# Altium PCB vertical.PcbDoc
Units mm, origin at the board's own origin, x right, y up, seen from the top; angles counter-clockwise.
Board outline 10.16 x 14.35 mm, 2 copper layers (Top Layer, Bottom Layer), stack 1.571 mm thick; 19 components, 20 nets, 81 pads, 15 vias.
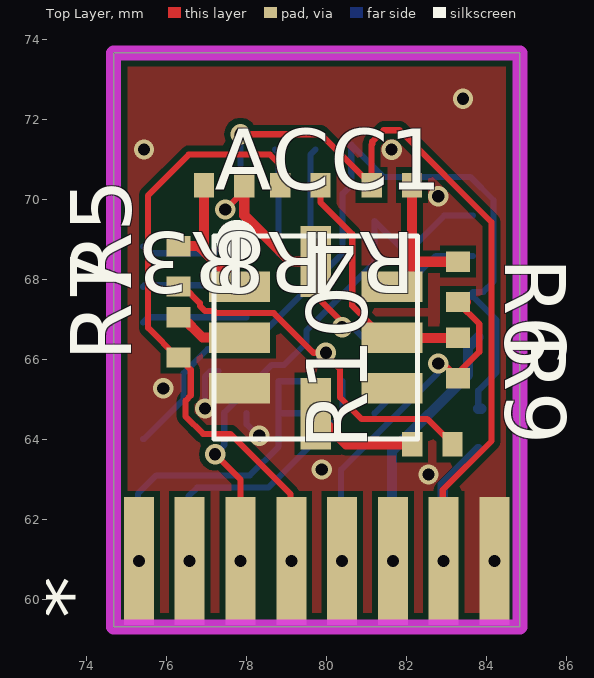
[diagram p0: Top Layer view]
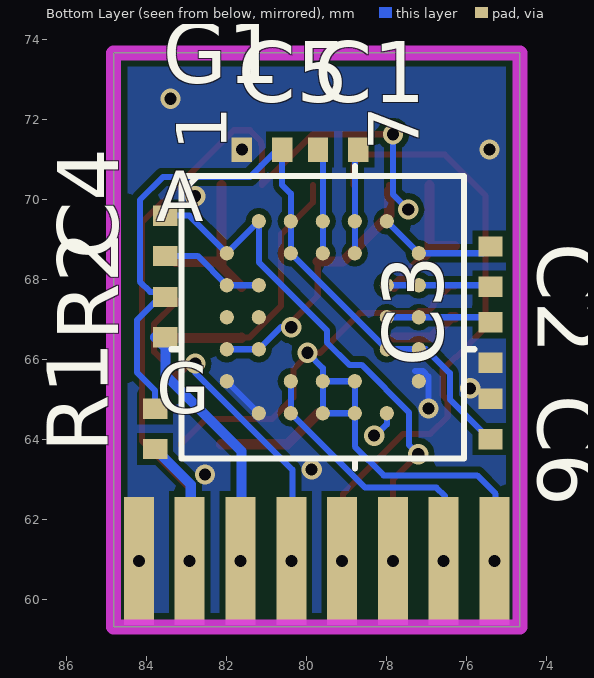
[diagram p1: Bottom Layer view, seen from below]

## Layer stack, top to bottom
Top Solder: solder mask 0.0102, Solder Resist, Dk 3.5
Top Layer: signal copper 0.0356
Dielectric 1: dielectric 1.5, FR-4, Dk 4.8
Bottom Layer: signal copper 0.0356
Bottom Solder: solder mask 0.0102, Solder Resist, Dk 3.5

## Board outline
74.676,59.309 74.676,73.66 84.836,73.66 84.836,59.309

## Design rules (kind name [scope] priority, off if disabled: settings)
Clearance [All] p1: gap=0.152
MinimumSolderMaskSliver [All] p1 off: minsoldermaskwidth=0.254
PolygonConnect [All] p1: connectstyle=Direct reliefconductorwidth=0.254 reliefentries=4 polygonreliefangle="90 Angle" airgapwidth=0.254
RoomDefinition IMU_VERTICAL [InComponentClass('IMU_VERTICAL')] p1 off: confinementstyle=ConfineIn formatcopy=TRUE lockcomponents=FALSE outline 178.943,26.797 202.692,26.797 202.692,38.735 178.943,38.735
RoutingVias [All] p1: holewidth=0.711 width=1.27 viastyle="Through Hole" minholewidth=0.305 minwidth=0.508 maxholewidth=0.711 maxwidth=1.27
SilkToBoardRegionClearance [All] p1 off:
SilkToSilkClearance [All] p1 off: silktosilkclearance=0.254
SilkToSolderMaskClearance [IsPad] p1 off: minsilkscreentomaskgap=0.254 clearancetoexposedcopper=TRUE
SolderMaskExpansion [All] p1: expansion=0.102
UnpouredPolygon [All] p1: allowunpoured=FALSE
Width [All] p1: maxlimit=0.254 minlimit=0.152 preferedwidth=0.254
25 further rules are at their usual default settings.

## Components (designator, comment, footprint, x,y, rotation, side; value= is the part's Value field where it differs from the comment)
* "socket/plug" plug 84.201,60.96 r180 top
ACC1 "ACC-8" ADXL203 79.731,66.544 r0 top
C1 "Cap" 0402 79.223,71.243 r180 bottom
C2 "Cap" 0402 75.413,68.322 r270 bottom
C3 "Cap" 0402 75.413,66.417 r90 bottom
C4 "Cap" 0402 83.541,69.084 r90 bottom
C5 "Cap" 0402 81.128,71.243 r180 bottom
C6 "Cap" 0402 75.413,64.512 r270 bottom
G1 "ADXRS620BBGZ" BG_32_3 79.604,67.052 r180 bottom
R1 "" 0402 83.795,64.258 r90 bottom
R2 "" 0402 83.541,67.052 r90 bottom
R3 "" 0402 77.445,70.354 r180 top
R4 "" 0402 81.636,70.354 r180 top
R5 "" 0402 76.302,68.322 r90 top
R6 "" 0402 83.287,67.941 r270 top
R7 "" 0402 76.302,66.544 r90 top
R8 "" 0402 79.35,70.354 r180 top
R9 "" 0402 83.287,66.036 r270 top
R10 "" 0402 82.652,63.877 r180 top

## Footprints (in the part's own frame and the unit in brackets; to place one, negate y for a bottom-side part, rotate by r counter-clockwise, add the part's x,y. Pads: shape width x height; smd on the part's side, far side on the other; paste and mask are expansions set on the pad)
0402 [mil] "0402-RES"
  rect 20x24 smd: 1(-19.68,0) 2(20,0)
ADXL203 [mil]
  rect 60x30 smd: 1(-75,50) 2(-75,0) 3(-75,-50) 5(75,-50) 6(75,0) 7(75,50)
  rect 30x70 smd: 4(0,-75) 8(0,75)
  silkscreen extent -100,-100 100,100, body extent -100,-100 100,100, height 80
BG_32_3 [mil]
  round 14 smd: A2(-62.99,94.49) A3(-31.5,94.49) A4(0,94.49) A5(31.5,94.49) A6(62.99,94.49) B1(-94.49,62.99) B3(-31.5,62.99) B4(0,62.99) B5(31.5,62.99) B7(94.49,62.99) C1(-94.49,31.5) C2(-62.99,31.5) C6(62.99,31.5) C7(94.49,31.5) D1(-94.49,0) D2(-62.99,0) D6(62.99,0) D7(94.49,0) E1(-94.49,-31.5) E2(-62.99,-31.5) E6(62.99,-31.5) E7(94.49,-31.5) F1(-94.49,-62.99) F3(-31.5,-62.99) F4(0,-62.99) F5(31.5,-62.99) F7(94.49,-62.99) G2(-62.99,-94.49) G3(-31.5,-94.49) G4(0,-94.49) G5(31.5,-94.49) G6(62.99,-94.49)
  silkscreen extent -149,-149 149,149, body extent -139,-139 139,139, height 138
plug [mm]
  rect 0.75x3.2 hole 0.3: 1(0,0) 1(0,0) 2(1.27,0) 3(2.54,0) 4(3.81,0) 5(5.08,0) 6(6.35,0) 7(7.62,0) 8(8.89,0)

## Part data
ACC1 G1: "Imported"
C1 C2 C3 C4 C5 C6: "Capacitor"
R1 R2 R3 R4 R5 R6 R7 R8 R9 R10: library part Res2, "Resistor"

## Via types
v1: diameter 0.508, hole 0.305, Top Layer to Bottom Layer, 15 vias

## Nets (pads, with @x,y where several pads share a name; then routed paths per layer and width w, separated by ;. In a path a pad name is that pad's centre, name@x,y a point inside that pad or via, vN(x,y) a via of type N, cw(c..) or ccw(c..) an arc to the next point about the centre after c; other vN are vias at no path point)
5V: *.2 ACC1.8 G1.E1 G1.E2 R1.1 R3.1 R4.2 | length 29.6
  Top Layer w0.152: v1(77.47,69.745) 77.945,70.22 R3.1 ; v1(77.851,71.628) 79.854,71.628 R4.2 81.128,71.37 81.145,71.388 81.145,71.443 81.428,71.726 81.827,71.726 84.125,69.429 84.125,63.954 82.906,62.734 *.2@82.906,61.464 ; ACC1.8 79.731,67.589 80.391,66.929 v1(80.391,66.802)
  Top Layer w0.254: R3.1@77.945,70.22 77.945,69.6 79.096,68.449 ACC1.8
  Bottom Layer w0.152: v1(77.47,69.745) 77.851,70.126 v1(77.851,71.628) ; v1(80.391,66.802) 80.654,66.802 G1.E2 G1.E1
  Bottom Layer w0.254: *.2@82.906,61.464 82.906,62.869 R1.1
6V: *.3 R2.1 | length 6
  Bottom Layer w0.254: *.3@81.636,61.464 81.636,63.705 83.541,65.61 83.541,66.298 R2.1@83.795,66.552
AX: *.4 R6.2 R9.2 | length 8.7
  Top Layer w0.152: v1(82.792,65.898) 82.918,65.898 R9.2 83.287,65.654 83.82,66.188 83.82,66.885 83.287,67.419 R6.2
  Top Layer w0.254: R9.2 R9.2@83.376,65.528 ; R6.2 R6.2@83.487,67.433
  Bottom Layer w0.152: *.4@80.366,61.464 80.366,63.24 82.792,65.666 v1(82.792,65.898)
AY: *.5 R7.1 R8.2 | length 15
  Top Layer w0.152: R8.2 78.842,70.862 78.588,71.116 76.556,71.116 75.54,70.1 75.54,66.789 76.284,66.044 R7.1 76.606,65.74 76.606,65.097 76.479,64.97 76.479,64.57 76.915,64.135 77.597,64.135 79.096,62.636 *.5@79.096,61.464
GND: *.1 ACC1.3 C3.1 C5.1 C6.1 G1.F1 G1.F7 G1.G2 G1.G6 | length 3.1
  Top Layer w0.152: v1(82.796,70.075) 82.796,70.096 v1@82.804,70.104
  Bottom Layer w0.152: v1(76.962,64.77) 76.962,65.57 77.098,65.706 77.296,65.706 ; G1.G6 78.004,64.373 78.283,64.093 v1(78.321,64.093) ; G1.G2 G1.F1
  other v1: 82.55,63.119 79.883,63.246 75.921,65.274 75.438,71.247 81.628,71.243 83.414,72.513
GYRO: *.6 C4.2 G1.A2 G1.B1 | length 13.8
  Top Layer w0.152: v1(77.216,63.627) 77.851,62.992 *.6
  Bottom Layer w0.152: v1(77.216,63.627) 77.445,63.856 77.445,64.668 78.635,65.859 78.94,65.859 79.502,66.421 79.502,66.726 81.204,68.427 G1.A2 G1.B1 82.944,69.592 C4.2@83.668,69.592
NetACC1_1: ACC1.1 R3.2 R5.2 | length 3.6
  Top Layer w0.254: R5.2 76.81,68.83 76.937,68.703 ; R3.2 76.937,68.703 ; ACC1.1 76.937,68.703
NetACC1_2: ACC1.2 R7.2 | length 1.7
  Top Layer w0.254: R7.2 76.391,67.052 76.899,66.544 ACC1.2
NetACC1_4: ACC1.4 R10.2 | length 2.7
  Top Layer w0.254: ACC1.4 80.493,63.877 R10.2
NetACC1_6: ACC1.6 R8.1 R9.1 | length 6.3
  Top Layer w0.152: R8.1 79.85,69.924 80.645,69.128 80.645,67.339 81.439,66.544 ACC1.6
  Top Layer w0.254: ACC1.6 81.644,66.536 R9.1
NetACC1_7: ACC1.7 R4.1 R6.1 | length 4
  Top Layer w0.254: ACC1.7 82.136,68.314 ; R4.1 82.136,68.314 ; R6.1 82.263,68.441 82.136,68.314
NetC1_1: C1.1 G1.A4 G1.B4 | length 2.6
  Bottom Layer w0.152: G1.B4 G1.A4 79.604,71.124 C1.1
NetC1_2: C1.2 G1.A5 G1.B5 | length 2.6
  Bottom Layer w0.152: C1.2 78.804,71.154 G1.A5 G1.B5
NetC2_1: C2.1 G1.A6 G1.B7 | length 3
  Bottom Layer w0.152: C2.1 75.583,68.652 G1.B7 G1.A6
NetC2_2: C2.2 G1.C6 G1.C7 | length 2.6
  Bottom Layer w0.152: C2.2 75.451,67.852 G1.C7 G1.C6
NetC3_2: C3.2 G1.D6 G1.D7 | length 2.6
  Bottom Layer w0.152: C3.2 75.54,67.052 G1.D7 G1.D6
NetC4_1: C4.1 G1.C1 G1.C2 | length 2.8
  Bottom Layer w0.152: G1.C2 G1.C1 82.736,68.584 C4.1@83.668,68.584
NetC5_2: C5.2 C6.2 G1.A3 G1.B3 G1.E6 G1.E7 R1.2 R2.2 | length 20.5
  Bottom Layer w0.152: C6.2 75.43,64.004 76.429,65.003 76.429,65.655 77.026,66.252 G1.E7 G1.E6 G1.B3 G1.A3 80.404,70.138 80.62,70.354 C5.2 80.62,71.37 81.145,70.845 ; 81.145,70.844 81.431,70.558 83.601,70.558 84.176,69.983 84.176,67.941 83.922,67.687 83.668,67.687 R2.2 83.668,67.56 84.252,66.976 84.252,65.675 83.795,65.218 R1.2
  Bottom Layer w0.254: R1.2 R1.2@83.878,64.766
ST: *.8 G1.F4 G1.F5 G1.G4 G1.G5 R5.1 R10.1 | length 19
  Top Layer w0.152: R5.1 76.414,67.822 76.835,67.401 76.835,67.339 76.969,67.205 77.194,67.205 77.245,67.154 78.682,67.154 79.673,66.163 v1(79.985,66.163) 79.985,66.113 80.34,65.757 80.34,65.046 80.874,64.512 82.517,64.512 R10.1
  Bottom Layer w0.152: *.8@75.286,61.464 75.286,62.636 75.748,63.099 78.085,63.099 78.804,63.818 G1.G5 ; v1(79.985,66.163) 79.604,65.782 G1.F4 ; G1.G5 G1.G4 G1.F4 ; G1.G5 G1.F5 G1.F4
TEMP: *.7 G1.F3 G1.G3 | length 6.6
  Bottom Layer w0.152: *.7@76.556,61.464 76.556,62.586 76.764,62.794 78.545,62.794 G1.G3 G1.F3
pads on no net: ACC1.5 G1.D1 G1.D2

## Polygon pours and split planes (outlines as drawn)
GND on Bottom Layer "Top Layer-No Net" (solid, remove dead copper, pour order 2): 84.836,73.66 74.676,73.66 74.676,59.309 84.836,59.309
GND on Top Layer "Top Layer-No Net" (solid, remove dead copper, pour order 4): 84.836,73.66 74.676,73.66 74.676,59.309 84.836,59.309

## Keep-outs
Keep-Out Layer:
  the board outline again, w0.381

## Silkscreen, mask and mechanical layers (free items; w line width, h text height)
Top Solder:
  rectangle: 75.057,72.136 84.455,73.279
Bottom Solder:
  rectangle: 75.057,72.136 84.455,73.279

## Text inside footprints (layer, text, board x,y; h text height)
G1: Bottom Overlay "7" at 77.204,71.218 h1.27 r270; Bottom Overlay "1" at 82.004,71.218 h1.27 r270; Bottom Overlay "G" at 83.769,64.652 h1.27; Bottom Overlay "A" at 83.769,69.452 h1.27; Mechanical 1 "7" at 77.204,71.218 h1.27 r270; Mechanical 1 "1" at 82.004,71.218 h1.27 r270; Mechanical 1 "G" at 83.769,64.652 h1.27; Mechanical 1 "A" at 83.769,69.452 h1.27